# Altium PCB PCB1.PcbDoc
Units mm, origin at the board's own origin, x right, y up, seen from the top; angles counter-clockwise.
Board outline 57.8 x 44.83 mm, 2 copper layers (Top Layer, Bottom Layer); 27 components, 45 nets, 174 pads, 36 vias.
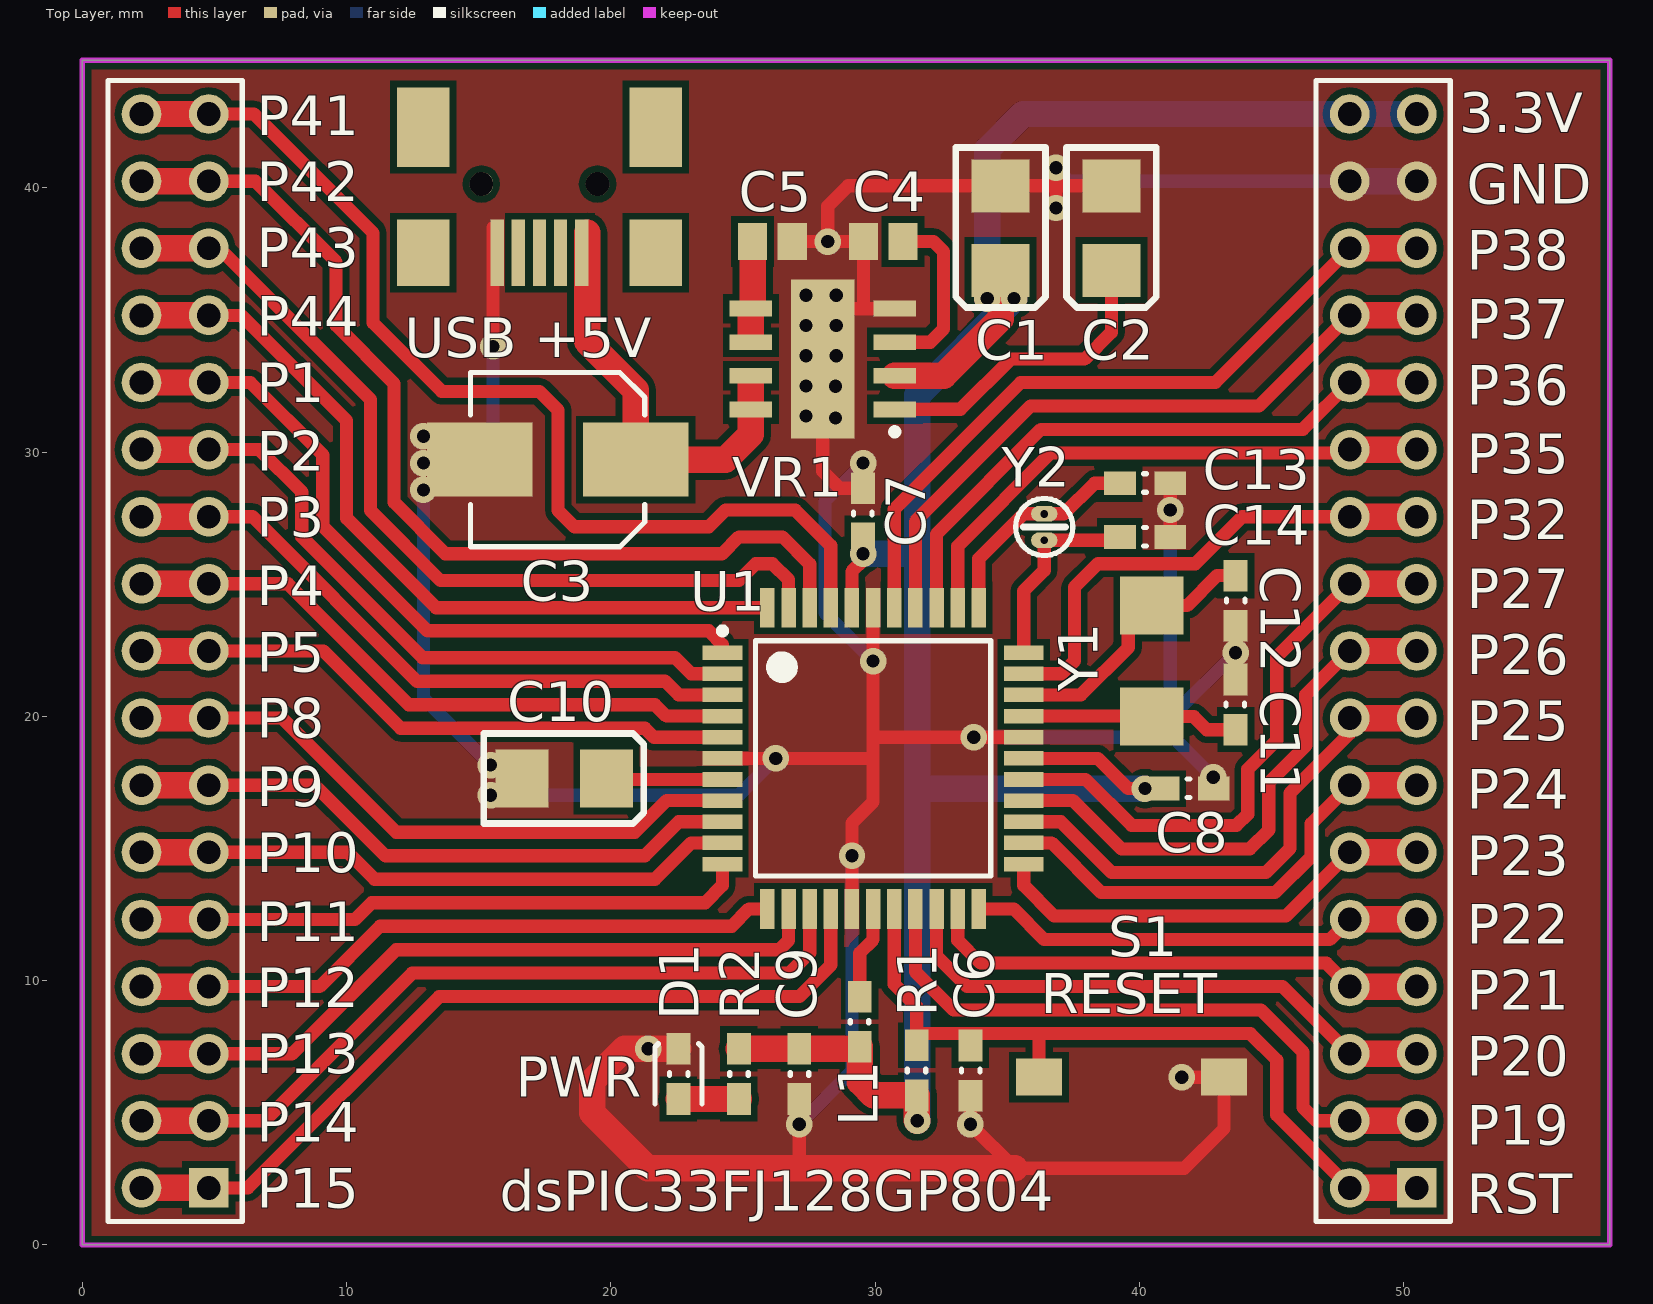
[diagram p0: Top Layer view]
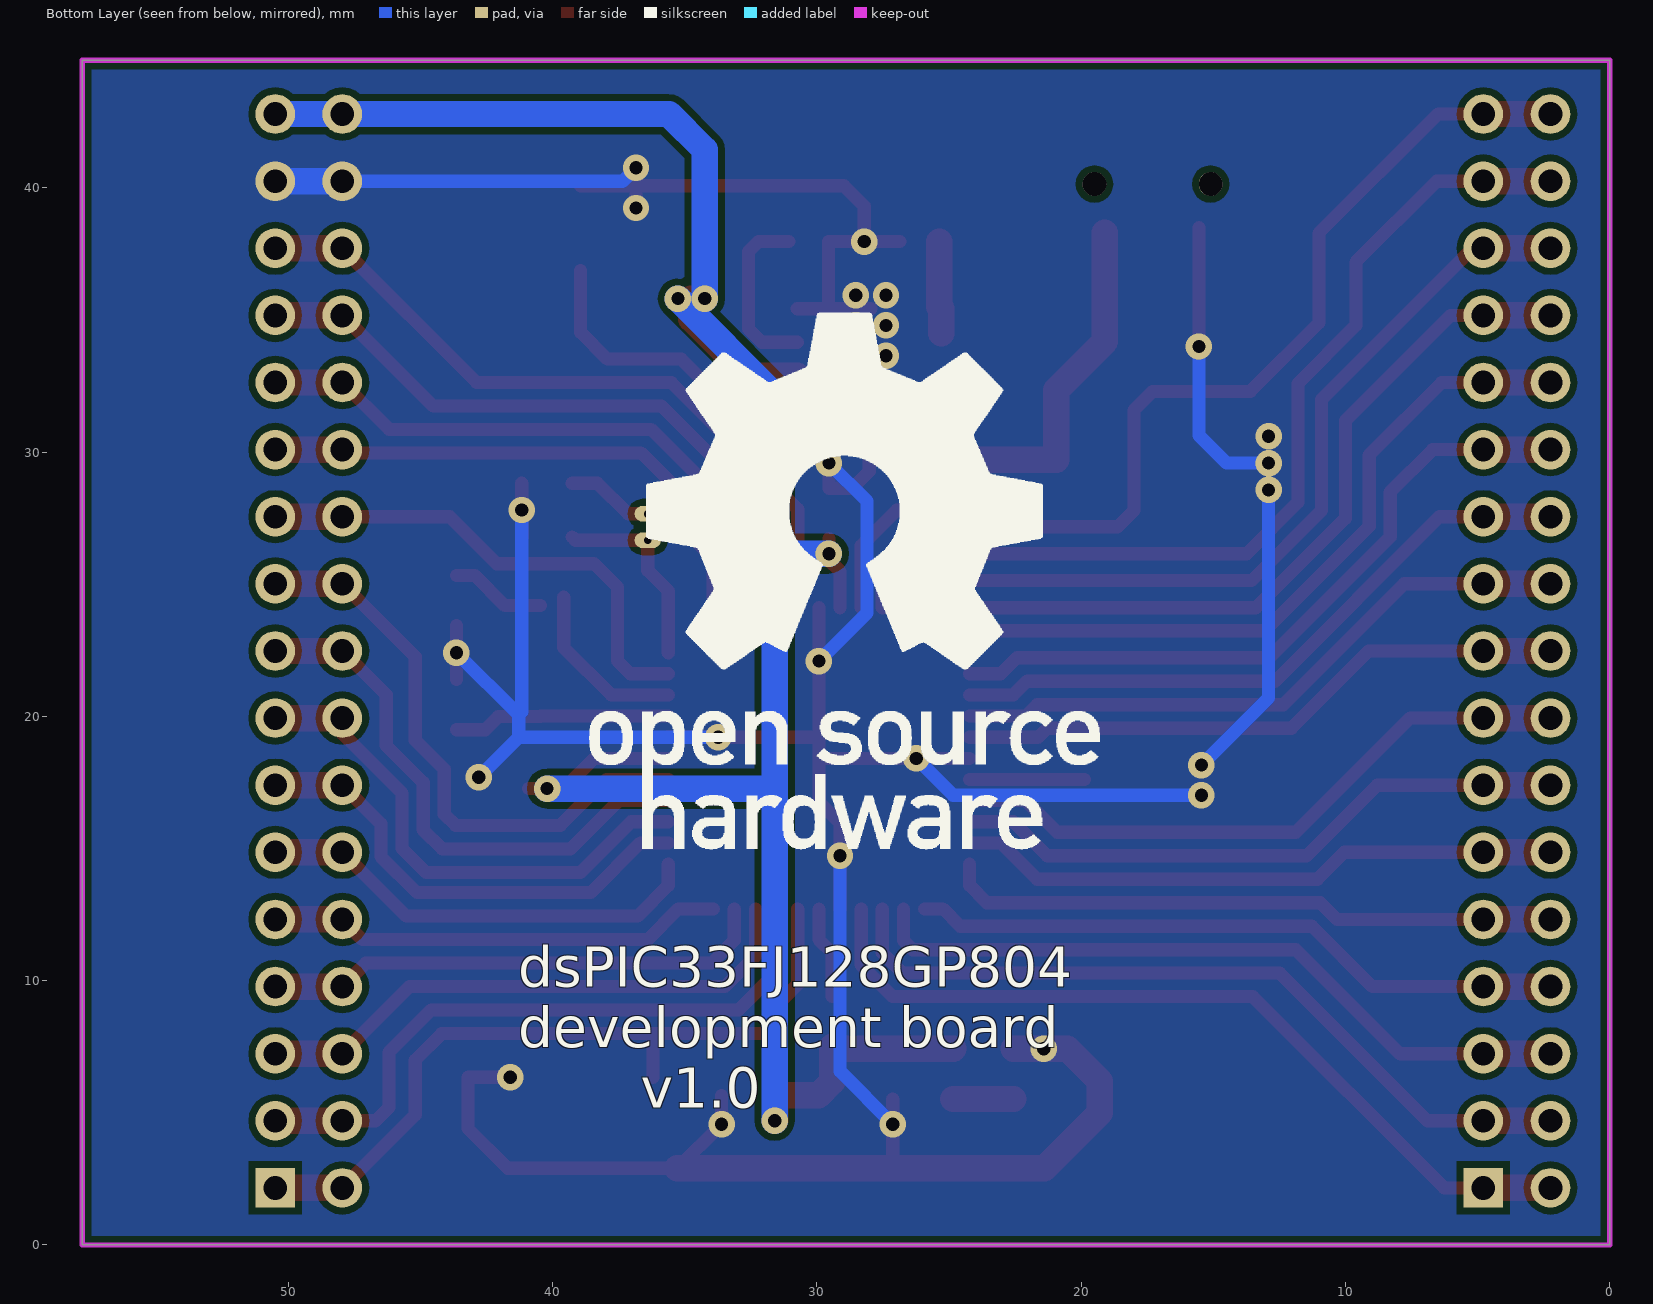
[diagram p1: Bottom Layer view, seen from below]

## Layer stack, top to bottom
Top Solder: solder mask 0.0102, Solder Resist, Dk 3.5
Top Layer: signal copper 0.0356
Dielectric 1: dielectric 0.32, FR-4, Dk 4.8
Bottom Layer: signal copper 0.0356
Bottom Solder: solder mask 0.0102, Solder Resist, Dk 3.5

## Board outline
0,0 0,44.831 57.8,44.831 57.8,0

## Design rules (kind name [scope] priority, off if disabled: settings)
Clearance Clearance_1 [InNamedPolygon('Bottom_GND') vs not InNet('GND')] p1: gap=0.25
Clearance Clearance_2 [InNamedPolygon('Top_GND') vs not InNet('GND')] p2: gap=0.25
Clearance [All] p3: gap=0.203
DiffPairsRouting [All] p1: maxlimit=100 minlimit=0.203 mostfreqgap=0.5 toplayer_minwidth=0.203 toplayer_maxwidth=100 toplayer_prefwidth=0.5 bottomlayer_minwidth=0.203 bottomlayer_maxwidth=100 bottomlayer_prefwidth=0.5 maxuncoupledlength=12.7
MinimumSolderMaskSliver [All] p1: minsoldermaskwidth=0
PlaneConnect [All] p1: planeconnectstyle=Direct reliefexpansion=0.508 reliefentries=4 reliefconductorwidth=0.254 reliefairgap=0.254
PolygonConnect [All] p1: connectstyle=Direct reliefconductorwidth=0.254 reliefentries=4 polygonreliefangle="90 Angle" airgapwidth=0.254
RoutingVias [All] p1: holewidth=0.711 width=1.27 viastyle="Through Hole" minholewidth=0.711 minwidth=1.27 maxholewidth=0.711 maxwidth=1.27
SilkToSilkClearance [All] p1: silktosilkclearance=0
SilkToSolderMaskClearance [IsPad] p1: minsilkscreentomaskgap=0 clearancetoexposedcopper=TRUE
SolderMaskExpansion [All] p1: expansion=0.102
Width [All] p1: maxlimit=100 minlimit=0.203 preferedwidth=0.5
25 further rules are at their usual default settings.

## Classes and differential pairs
differential pair XTAL2: +XTAL2_P -XTAL2_N
differential pair XTAL1: +XTAL1_P -XTAL1_N

## Components (designator, comment, footprint, x,y, rotation, side; value= is the part's Value field where it differs from the comment)
C1 "Tantal B" AVX-CAPC3528_V 34.752,38.481 r90 top
C2 "Tantal B" AVX-CAPC3528_V 38.943,38.481 r90 top
C3 "Aluminium" "PANASONIC SIZE D8" 17.988,29.718 r180 top
C4 "C0805" C0805 30.307,37.973 r0 top
C5 "C0805" C0805 26.116,37.973 r180 top
C6 "C0603" 0603_HANDSOLDERING 33.609,6.604 r90 top
C7 "C0603" 0603_HANDSOLDERING 29.545,27.686 r270 top
C8 "C0603" 0603_HANDSOLDERING 41.864,17.272 r180 top
C9 "C0603" 0603_HANDSOLDERING 27.132,6.477 r90 top
C10 "Tantal B" AVX-CAPC3528_V 18.242,17.653 r180 top
C11 "C0603" 0603_HANDSOLDERING 43.642,20.447 r270 top
C12 "C0603" 0603_HANDSOLDERING 43.642,24.384 r90 top
C13 "C0603" 0603_HANDSOLDERING 40.213,26.797 r180 top
C14 "C0603" 0603_HANDSOLDERING 40.213,28.829 r180 top
D1 "LED 0603" 0603_LED 22.56,6.477 r90 top
L1 "i0603" 0603_HANDSOLDERING 29.418,8.444 r270 top
P15 "Header 17X2" HDR2X17 4.78,2.159 r90 top (schematic designator P1)
R1 "R0603" 0603_HANDSOLDERING 31.577,6.604 r270 top
R2 "R0603" 0603_HANDSOLDERING 24.846,6.477 r90 top
RST "Header 17X2" HDR2X17 50.5,2.159 r90 top (schematic designator P2)
S1 "SW-SPST" KSR221G_LFS_TACTILE_SWITCH 39.705,6.35 r0 top
U1 "dsPIC33FJ128GP804" DSPIC33FJ128GP804_TQFP44 29.926,18.415 r0 top
"USB +5V" "USB_mini_B" "USB MINI B RECEPTACLE" 17.3,40.3 r180 top (schematic designator J1)
VR1 "ADM7150" ADM7150_SOIC8 30.746,31.623 r180 top
Y1 "XTAL" "TXC  7A-20.000MAAJ-T  XTAL" 40.467,22.098 r90 top
Y2 "XTAL" "RALTRON R26-32.768- 12.5  CRYSTAL" 36.403,26.67 r90 top
? "Comment" OpenSourceLOGO 28.9,27.7 r180 bottom

## Footprints (in the part's own frame and the unit in brackets; to place one, negate y for a bottom-side part, rotate by r counter-clockwise, add the part's x,y. Pads: shape width x height; smd on the part's side, far side on the other; paste and mask are expansions set on the pad)
0603_HANDSOLDERING [mm] "Chip Resistor, 2-Leads, Body 1.6x0.8mm, IPC Medium Density"
  rect 1.2x0.9 smd: 1(-0.954,0) 2(0.946,0)
  silkscreen extent -0.05,-0.36 0.05,0.34, body extent -0.85,-0.48 0.85,0.47, height 0.6
0603_LED [mm] "SMD LED, Body 1.6x0.8mm"
  rect 1.2x0.9 smd: 1(-0.954,0) 2(0.946,0)
  silkscreen extent -1.14,-0.89 1.14,0.89, body extent -0.85,-0.48 0.85,0.47, height 0.6
ADM7150_SOIC8 [mm] "SOIC, 8-Leads, Body 4,90x3,90mm, Pitch 1,27mm, Thermal Pad 6,00x2,41mm, IPC Medium Density"
  rect 1.6x0.6 smd: 1(0,0) 2(0,-1.27) 3(0,-2.54) 4(0,-3.81) 5(5.45,-3.81) 6(5.45,-2.54) 7(5.45,-1.27) 8(5.45,0)
  rect 2.41x6 smd: 4(2.725,-1.905)
  silkscreen extent -0.13,0.73 0.12,0.97, body extent 0.72,-4.41 4.72,0.6, height 1.65
AVX-CAPC3528_V [mm] "SMT Capacitor, 2 Leads, Body 3.5x2.8mm"
  rect 2x2.2 smd: 1(-1.6,0) 2(1.6,0)
  silkscreen extent -3,-1.7 3.05,1.7, body extent -1.79,-1.54 1.8,1.54, height 1.9
C0805 [mm] "Chip Capacitor, Body 2.0x1.3mm, IPC High Density"
  rect 1.1x1.4 smd: 1(-0.75,0) 2(0.75,0)
  body extent -1.1,-0.72 1.1,0.72, height 1.4
DSPIC33FJ128GP804_TQFP44 [mm] "TQFP, 44-Leads, Body 12,0x12,0mm (max), Pitch 0,80mm, IPC Medium Density"
  rect 1.5x0.55 smd: 1(-5.7,4) 2(-5.7,3.2) 3(-5.7,2.4) 4(-5.7,1.6) 5(-5.7,0.8) 6(-5.7,0) 7(-5.7,-0.8) 8(-5.7,-1.6) 9(-5.7,-2.4) 10(-5.7,-3.2) 11(-5.7,-4) 23(5.7,-4) 24(5.7,-3.2) 25(5.7,-2.4) 26(5.7,-1.6) 27(5.7,-0.8) 28(5.7,0) 29(5.7,0.8) 30(5.7,1.6) 31(5.7,2.4) 32(5.7,3.2) 33(5.7,4)
  rect 0.55x1.5 smd: 12(-4,-5.7) 13(-3.2,-5.7) 14(-2.4,-5.7) 15(-1.6,-5.7) 16(-0.8,-5.7) 17(0,-5.7) 18(0.8,-5.7) 19(1.6,-5.7) 20(2.4,-5.7) 21(3.2,-5.7) 22(4,-5.7) 34(4,5.7) 35(3.2,5.7) 36(2.4,5.7) 37(1.6,5.7) 38(0.8,5.7) 39(0,5.7) 40(-0.8,5.7) 41(-1.6,5.7) 42(-2.4,5.7) 43(-3.2,5.7) 44(-4,5.7)
  silkscreen extent -5.82,-4.45 4.45,4.95, body extent -5,-5 5,5, height 1.2
HDR2X17 [mm] "Connector; Header; 17x2 Position"
  rect 1.5x1.5 hole 0.9: 1(0,0)
  round 1.5 hole 0.9: 2(0,2.54) 3(2.54,0) 4(2.54,2.54) 5(5.08,0) 6(5.08,2.54) 7(7.62,0) 8(7.62,2.54) 9(10.16,0) 10(10.16,2.54) 11(12.7,0) 12(12.7,2.54) 13(15.24,0) 14(15.24,2.54) 15(17.78,0) 16(17.78,2.54) 17(20.32,0) 18(20.32,2.54) 19(22.86,0) 20(22.86,2.54) 21(25.4,0) 22(25.4,2.54) 23(27.94,0) 24(27.94,2.54) 25(30.48,0) 26(30.48,2.54) 27(33.02,0) 28(33.02,2.54) 29(35.56,0) 30(35.56,2.54) 31(38.1,0) 32(38.1,2.54) 33(40.64,0) 34(40.64,2.54)
  silkscreen extent -1.27,-1.27 41.91,3.81
KSR221G_LFS_TACTILE_SWITCH [mm] "C & K COMPONENTS  KSR221G LFS  SWITCH, SPST, 0.05A, 32VDC, SMD"
  rect 1.75x1.4 smd: 1(-3.5,0) 2(3.5,0)
  body extent -3.17,-2.03 3.17,2.03, height 2.5
OpenSourceLOGO [mm]
  silkscreen extent -9.72,-12.73 9.6,7.57
"PANASONIC SIZE D8" [mm] "Aluminum Electrolytic Capacitor, Body 6,60x6,60x7,70mm, IPC Low Density"
  rect 4x2.8 smd: 1(-2.95,0) 2(2.95,0)
  silkscreen extent -3.3,-3.3 3.3,3.3, body extent -3.3,-3.3 3.3,3.3, height 7.7
"RALTRON R26-32.768- 12.5  CRYSTAL" [mm] "RALTRON  R26-32.768- 12.5  CRYSTAL, TUNING FORK, 32.768KHZ"
  oval 0.6x1 hole 0.3: 1(0,0) 2(1,0)
  silkscreen extent -0.58,-1.08 1.58,1.08, body extent -0.55,-1.05 1.55,1.05, height 7.2
"TXC  7A-20.000MAAJ-T  XTAL" [mm] "TXC  7A-20.000MAAJ-T  XTAL, 20.000MHZ, 18PF, SMD, 5.0X3.2"
  rect 2.2x2.4 smd: 1(-2.1,0) 2(2.1,0)
  body extent -2.5,-1.6 2.5,1.6, height 1.2
"USB MINI B RECEPTACLE" [mm] "popravek"
  rect 0.5x2.5 smd: 1(-1.6,2.75) 2(-0.8,2.75) 3(0,2.75) 4(0.8,2.75) 5(1.6,2.75)
  rect 2x3 smd: 6(-4.4,-2) 6(4.4,-2)
  rect 2x2.5 smd: 6(-4.4,2.75) 6(4.4,2.75)
  round 0.9 hole 0.9: ""(-2.2,0.15) ""(2.2,0.15)
  body extent -4.95,-5.75 4.95,3.25, height 4

## Part data
C1 C2 C10: library part "Cap Pol1", "Tantalum Capacitor"
C3: library part "Cap Pol1", "Aluminium Capacitor"
C4 C5 C6 C7 C8 C9 C11 C12 C13 C14: library part Cap, "Ceramic Capacitor"
D1: library part LED2, "SMD LED 0603"
L1: library part Inductor, "Inductor"
P15 RST: "Header, 17-Pin, Dual row"
R1 R2: library part Res2, "Resistor"
S1: "KSR221G LFS Tactile Switch"
U1: "dsPIC 40 MIPS"
"USB +5V": "USB 2.0 mini B receptacle"
VR1: "800 mA Ultralow Noise,  High PSRR, RF Linear Regulator"
Y1: "TXC  7A-20.000MAAJ-T  XTAL"
Y2: "RALTRON  R26-32.768- 12.5  CRYSTAL"

## Via types
v1: diameter 1, hole 0.5, Top Layer to Bottom Layer, 36 vias

## Nets (pads, with @x,y where several pads share a name; then routed paths per layer and width w, separated by ;. In a path a pad name is that pad's centre, name@x,y a point inside that pad or via, vN(x,y) a via of type N, cw(c..) or ccw(c..) an arc to the next point about the centre after c; other vN are vias at no path point)
+3.3V: C1.1 C7.2 C8.2 C9.2 L1.2 R1.2 R2.2 RST.33 RST.34 U1.28 U1.40 VR1.2 | length 89.3
  Top Layer w0.5: U1.40 29.126,25.489 29.545,25.908 v1(29.545,26.162) C7.2 ; L1.2@29.343,7.423 L1.2 ; U1.28 38.435,18.415 39.578,17.272 v1(40.213,17.272) C8.2
  Top Layer w1: R2.2 C9.2 L1.2@29.343,7.423 ; L1.2 29.418,6.182 29.942,5.658 R1.2 31.577,4.723 v1(31.6,4.7) ; VR1.2 32.593,32.893 34.752,35.052 34.752,35.814
  Bottom Layer w0.5: 31.562,26.162 31.6,26.2 ; 31.6,17.4 31.728,17.272
  Bottom Layer w1: v1(29.545,26.162) 31.562,26.162 ; v1(31.6,4.7) 31.6,17.4 31.6,26.2 31.6,32.154 v1(35.26,35.814) ; 31.728,17.272 v1(40.213,17.272) ; v1(34.244,35.814) 34.244,41.444 35.599,42.799 RST.34 RST.33
+5V: "USB +5V.1" C3.1 VR1.7 VR1.8 | length 16
  Top Layer w1: 19.1,38.3 19.1,34.194 20.938,32.356 C3.1 24.338,29.718 25.296,30.676 VR1.8 VR1.7@25.296,32.6
AVDD: L1.1 U1.17 | length 3.5
  Top Layer w0.5: L1.1 29.418,11.049 29.926,11.557 U1.17
GND: "USB +5V.5" C1.2 C2.2 C3.2 C4.1 C5.1 C6.1 C7.1 C8.1 C9.1 C10.2 C11.1 C12.1 C13.1 C14.1 D1.2 RST.31 RST.32 S1.2 U1.6 U1.16 U1.29 U1.39 VR1.4 | length 185
  Top Layer w0.5: v1(15.544,34) 15.544,38.5 ; U1.6 v1(26.243,18.415) 29.799,18.415 ; C5.1 v1(28.211,37.973) ; 27.132,2.932 v1(27.132,4.572) C9.1 ; VR1.4@27.952,35.433 VR1.4@30.746,35.433 ; VR1.4@28.021,33.528 28.021,29.279 28.66,28.64 C7.1 v1(29.545,29.591) ; U1.16 v1(29.126,14.732) 29.126,15.964 29.926,16.764 v1(29.926,22.098) U1.39 ; 29.557,35.445 C4.1 v1(28.211,37.973) ; 29.964,19.215 v1(33.736,19.215) U1.29 ; C6.1 v1(33.609,4.572) 35.281,2.9 41.7,2.9 43.205,4.405 S1.2 v1(41.61,6.35) ; v1(36.848,39.243) 36.848,40.081 ; v1(36.848,40.767) 36.848,40.081 ; C2.2 36.848,40.081 ; C13.1 v1(41.167,27.813) C14.1 ; C11.1 v1(43.642,22.415) C12.1 ; v1(28.211,37.973) 28.211,39.311 28.981,40.081 C1.2 36.848,40.081
  Top Layer w1: D1.2 v1(21.417,7.423) 20.523,7.423 19.3,6.2 19.3,5 21.4,2.9 35.281,2.9
  Bottom Layer w0.5: v1(12.908,28.575) 12.908,20.701 v1(15.448,18.161) ; v1(12.908,29.591) 14.491,29.591 15.544,30.644 v1(15.544,34) ; v1(15.448,17.018) 24.846,17.018 v1(26.243,18.415) ; v1(27.132,4.572) 29.126,6.566 v1(29.126,14.732) ; v1(29.545,29.591) 28.1,28.146 28.1,23.924 v1(29.926,22.098) ; v1(33.736,19.215) 41.285,19.215 ; v1(36.848,40.767) 37.356,40.259 RST.32 ; v1(41.167,27.813) 41.167,20.176 41.285,20.058 ; v1(42.8,17.7) 41.285,19.215 ; v1(43.642,22.415) 41.285,20.058 ; 41.285,19.215 41.285,20.058
  Bottom Layer w1: RST.32 RST.31
  other v1: 12.908,30.607 28.5,31.3 27.386,31.369 27.386,32.512 28.5,32.5 27.386,33.655 28.529,33.655 27.386,34.798 28.529,34.798 27.386,35.941 28.529,35.941
NetC2_1: C2.1 VR1.1 | length 11.7
  Top Layer w0.5: VR1.1 33.228,31.623 35.133,33.528 37.927,33.528 38.943,34.544 C2.1
NetC4_2: C4.2 VR1.3 | length 6.7
  Top Layer w0.5: VR1.3 32.085,34.163 32.593,34.671 32.593,37.592 32.212,37.973 C4.2
NetC5_2: C5.2 VR1.5 VR1.6 | length 3.4
  Top Layer w1: 25.296,34.5 VR1.5 ; VR1.5@25.366,35.503 C5.2
NetD1_1: D1.1 R2.1 | length 2.3
  Top Layer w1: D1.1 R2.1
P1: P15.25 P15.26 U1.1 | length 28
  Top Layer w0.5: P15.25 6.361,32.639 9.1,29.9 9.1,27.2 13.059,23.241 23.703,23.241 24.226,22.718 U1.1
  Top Layer w1: P15.26 P15.25
P2: P15.23 P15.24 U1.2 | length 26.5
  Top Layer w0.5: P15.23 6.701,30.099 8.3,28.5 8.3,26.8 12.875,22.225 22.433,22.225 23.043,21.615 U1.2
  Top Layer w1: P15.24 P15.23
P3: P15.21 P15.22 U1.3 | length 24.8
  Top Layer w0.5: P15.21 6.441,27.559 12.664,21.336 22.052,21.336 22.573,20.815 U1.3
  Top Layer w1: P15.22 P15.21
P4: P15.19 P15.20 U1.4 | length 24.1
  Top Layer w0.5: P15.19 7.781,25.019 12.353,20.447 21.671,20.447 22.103,20.015 U1.4
  Top Layer w1: P15.20 P15.19
P5: P15.17 P15.18 U1.5 | length 23.3
  Top Layer w0.5: P15.17 9.121,22.479 12.042,19.558 21.29,19.558 21.633,19.215 U1.5
  Top Layer w1: P15.18 P15.17
P8: P15.15 P15.16 U1.8 | length 24.3
  Top Layer w0.5: P15.15 7.561,19.939 11.879,15.621 20.909,15.621 22.103,16.815 U1.8
  Top Layer w1: P15.16 P15.15
P9: P15.13 P15.14 U1.9 | length 23.6
  Top Layer w0.5: P15.13 8.801,17.399 11.468,14.732 21.29,14.732 22.573,16.015 U1.9
  Top Layer w1: P15.14 P15.13
P10: P15.11 P15.12 U1.10 | length 23
  Top Layer w0.5: P15.11 10.041,14.859 11.057,13.843 21.671,13.843 23.043,15.215 U1.10
  Top Layer w1: P15.12 P15.11
P11: P15.9 P15.10 U1.11 | length 23.3
  Top Layer w0.5: P15.9 10.319,12.319 10.954,12.954 23.576,12.954 24.226,13.604 U1.11
  Top Layer w1: P15.10 P15.9
P12: P15.7 P15.8 U1.12 | length 24.9
  Top Layer w0.5: P15.7 8.979,9.779 11.265,12.065 24.577,12.065 25.227,12.715 U1.12
  Top Layer w1: P15.8 P15.7
P13: P15.5 P15.6 U1.13 | length 27.4
  Top Layer w0.5: P15.5 7.939,7.239 11.876,11.176 26.37,11.176 26.726,11.532 U1.13
  Top Layer w1: P15.6 P15.5
P14: P15.3 P15.4 U1.14 | length 29.6
  Top Layer w0.5: P15.3 6.899,4.699 12.487,10.287 26.751,10.287 27.526,11.062 U1.14
  Top Layer w1: P15.4 P15.3
P15: P15.1 P15.2 U1.15 | length 31.7
  Top Layer w0.5: P15.1 6.259,2.159 13.498,9.398 27.132,9.398 28.326,10.592 U1.15
  Top Layer w1: P15.2 P15.1
P19: RST.3 RST.4 U1.19 | length 24.9
  Top Layer w0.5: U1.19 31.526,10.338 32.974,8.89 44.61,8.89 46.2,7.3 46.2,5.2 46.701,4.699 RST.4
  Top Layer w1: RST.4 RST.3
P20: RST.5 RST.6 U1.20 | length 21.5
  Top Layer w0.5: U1.20 32.326,10.935 33.482,9.779 45.42,9.779 RST.6
  Top Layer w1: RST.6 RST.5
P21: RST.7 RST.8 U1.21 | length 19.3
  Top Layer w0.5: U1.21 33.126,11.532 33.99,10.668 47.071,10.668 RST.8
  Top Layer w1: RST.8 RST.7
P22: RST.9 RST.10 U1.22 | length 17.4
  Top Layer w0.5: U1.22 35.245,12.715 36.403,11.557 47.198,11.557 RST.10
  Top Layer w1: RST.10 RST.9
P23: RST.11 RST.12 U1.23 | length 17.2
  Top Layer w0.5: U1.23 35.626,13.604 36.784,12.446 45.547,12.446 RST.12
  Top Layer w1: RST.12 RST.11
P24: RST.13 RST.14 U1.24 | length 18.1
  Top Layer w0.5: U1.24 36.682,15.215 38.562,13.335 45.135,13.335 46.5,14.7 46.5,15.939 RST.14
  Top Layer w1: RST.14 RST.13
P25: RST.15 RST.16 U1.25 | length 19.7
  Top Layer w0.5: U1.25 37.025,16.015 38.943,14.097 44.797,14.097 45.7,15 45.7,17.1 47.96,19.36 RST.16
  Top Layer w1: RST.16 RST.15
P26: RST.17 RST.18 U1.26 | length 20.9
  Top Layer w0.5: U1.26 37.495,16.815 39.324,14.986 44.186,14.986 44.9,15.7 44.9,17.5 46.3,18.9 46.3,20.819 RST.18
  Top Layer w1: RST.18 RST.17
P27: RST.19 RST.20 U1.27 | length 22.2
  Top Layer w0.5: U1.27 37.965,17.615 39.705,15.875 43.675,15.875 44.1,16.3 44.1,18 45.2,19.1 45.2,22.259 RST.20
  Top Layer w1: RST.20 RST.19
P32: RST.21 RST.22 U1.32 | length 19
  Top Layer w0.5: U1.32 37.063,21.615 37.546,22.098 37.546,24.892 38.435,25.781 42.118,25.781 43.896,27.559 RST.22
  Top Layer w1: RST.22 RST.21
P35: RST.23 RST.24 U1.35 | length 21.2
  Top Layer w0.5: U1.35 33.126,26.441 36.657,29.972 47.833,29.972 RST.24
  Top Layer w1: RST.24 RST.23
P36: RST.25 RST.26 U1.36 | length 23.3
  Top Layer w0.5: U1.36 32.326,26.911 36.276,30.861 46.182,30.861 RST.26
  Top Layer w1: RST.26 RST.25
P37: RST.27 RST.28 U1.37 | length 25.5
  Top Layer w0.5: U1.37 31.526,27.381 35.895,31.75 44.531,31.75 RST.28
  Top Layer w1: RST.28 RST.27
P38: RST.29 RST.30 U1.38 | length 27.6
  Top Layer w0.5: U1.38 30.726,27.851 35.514,32.639 42.88,32.639 RST.30
  Top Layer w1: RST.30 RST.29
P41: P15.33 P15.34 U1.41 | length 39.9
  Top Layer w0.5: P15.33 6.501,42.799 11,38.3 11,34.9 13.6,32.3 17.3,32.3 18,31.6 18,27.8 18.622,27.178 23.703,27.178 24.338,27.813 26.98,27.813 28.326,26.467 U1.41
  Top Layer w1: P15.34 P15.33
P42: P15.31 P15.32 U1.42 | length 37.5
  Top Layer w0.5: P15.31 6.541,40.259 9.6,37.2 9.6,34.8 11.8,32.6 11.8,28.1 13.738,26.162 24.211,26.162 24.846,26.797 26.497,26.797 27.526,25.768 U1.42
  Top Layer w1: P15.32 P15.31
P43: P15.29 P15.30 U1.43 | length 33.7
  Top Layer w0.5: P15.29 5.181,37.719 10.9,32 10.9,27.8 13.554,25.146 24.846,25.146 25.481,25.781 26.116,25.781 26.726,25.171 U1.43
  Top Layer w1: P15.30 P15.29
P44: P15.27 P15.28 U1.44 | length 30.4
  Top Layer w0.5: P15.27 6.021,35.179 10,31.2 10,27.5 13.385,24.115 U1.44
  Top Layer w1: P15.28 P15.27
RESET: C6.2 R1.1 RST.1 RST.2 S1.1 U1.18 | length 30.2
  Top Layer w0.5: U1.18 30.726,9.868 31.577,9.017 R1.1 31.577,8.001 36.149,8.001 ; S1.1 36.205,7.945 36.149,8.001 ; RST.2 45.2,4.919 45.2,7 44.199,8.001 36.149,8.001
  Top Layer w1: RST.2 RST.1
VCAP: C10.1 U1.7 | length 4.3
  Top Layer w0.5: C10.1@19.88,17.615 U1.7
XTAL1_N: C12.2 U1.31 Y1.2 | length 10.2
  Top Layer w0.5: U1.31 37.787,20.815 39.578,22.606 Y1.2@39.578,24.511 ; Y1.2 41.805,24.198 42.937,25.33 C12.2
XTAL1_P: C11.2 U1.30 Y1.1 | length 8.2
  Top Layer w0.5: U1.30 40.45,20.015 Y1.1 42.059,19.998 42.556,19.501 C11.2
XTAL2_N: C14.2 U1.34 Y2.2 | length 8.4
  Top Layer w0.5: U1.34 33.926,25.971 35.625,27.67 Y2.2 37.149,27.67 38.308,28.829 C14.2
XTAL2_P: C13.2 U1.33 Y2.1 | length 7.5
  Top Layer w0.5: U1.33 35.626,24.75 36.403,25.527 Y2.1 39.14,26.67 C13.2
pads on no net: "USB +5V.2" "USB +5V.3" "USB +5V.4" "USB +5V.6" "USB +5V."

## Polygon pours and split planes (outlines as drawn)
GND on Top Layer "Top_GND" (solid, pour order 0): 0,0 0,44.831 57.8,44.831 57.8,0
GND on Bottom Layer "Bottom_GND" (solid, pour order 1): 0,0 0,44.831 57.8,44.831 57.8,0

## Keep-outs
Keep-Out Layer:
  the board outline again, w0.2

## Silkscreen, mask and mechanical layers (free items; w line width, h text height)
Top Overlay:
  text "3.3V" at 52.1,42.1 h1.5
  text "P41" at 6.6,42 h1.5
  text "P42" at 6.6,39.5 h1.5
  text "GND" at 52.4,39.4 h1.5
  text "P43" at 6.6,37 h1.5
  text "P38" at 52.4,36.9 h1.5
  text "P44" at 6.6,34.4 h1.5
  text "P37" at 52.4,34.3 h1.5
  text "P1" at 6.6,31.9 h1.5
  text "P36" at 52.4,31.8 h1.5
  text "P2" at 6.6,29.3 h1.5
  text "P35" at 52.4,29.2 h1.5
  text "P3" at 6.6,26.8 h1.5
  text "P32" at 52.4,26.7 h1.5
  text "P4" at 6.6,24.2 h1.5
  text "P27" at 52.4,24.1 h1.5
  text "P5" at 6.6,21.7 h1.5
  text "P26" at 52.4,21.6 h1.5
  text "P8" at 6.6,19.2 h1.5
  text "P25" at 52.4,19.1 h1.5
  text "P9" at 6.6,16.6 h1.5
  text "P24" at 52.4,16.5 h1.5
  text "P10" at 6.6,14.1 h1.5
  text "P23" at 52.4,14 h1.5
  text "P11" at 6.6,11.5 h1.5
  text "P22" at 52.4,11.4 h1.5
  text "P12" at 6.6,9 h1.5
  text "P21" at 52.4,8.9 h1.5
  text "RESET" at 36.276,8.763 h1.52
  text "P13" at 6.6,6.5 h1.5
  text "P20" at 52.4,6.4 h1.5
  text "PWR" at 16.4,5.6 h1.52
  text "P14" at 6.6,3.9 h1.5
  text "P19" at 52.4,3.8 h1.5
  text "dsPIC33FJ128GP804" at 15.8,1.3 h1.52
Bottom Overlay:
  text "dsPIC33FJ128GP804 / development board /        v1.0" at 41.3,5.2 h1.52